# Altium PCB NAPaC_PCB1.PcbDoc
Units mm, origin at the board's own origin, x right, y up, seen from the top; angles counter-clockwise.
Board outline 59.06 x 40.1 mm, 2 copper layers (Top Layer, Bottom Layer); 50 components, 46 nets, 234 pads, 46 vias.
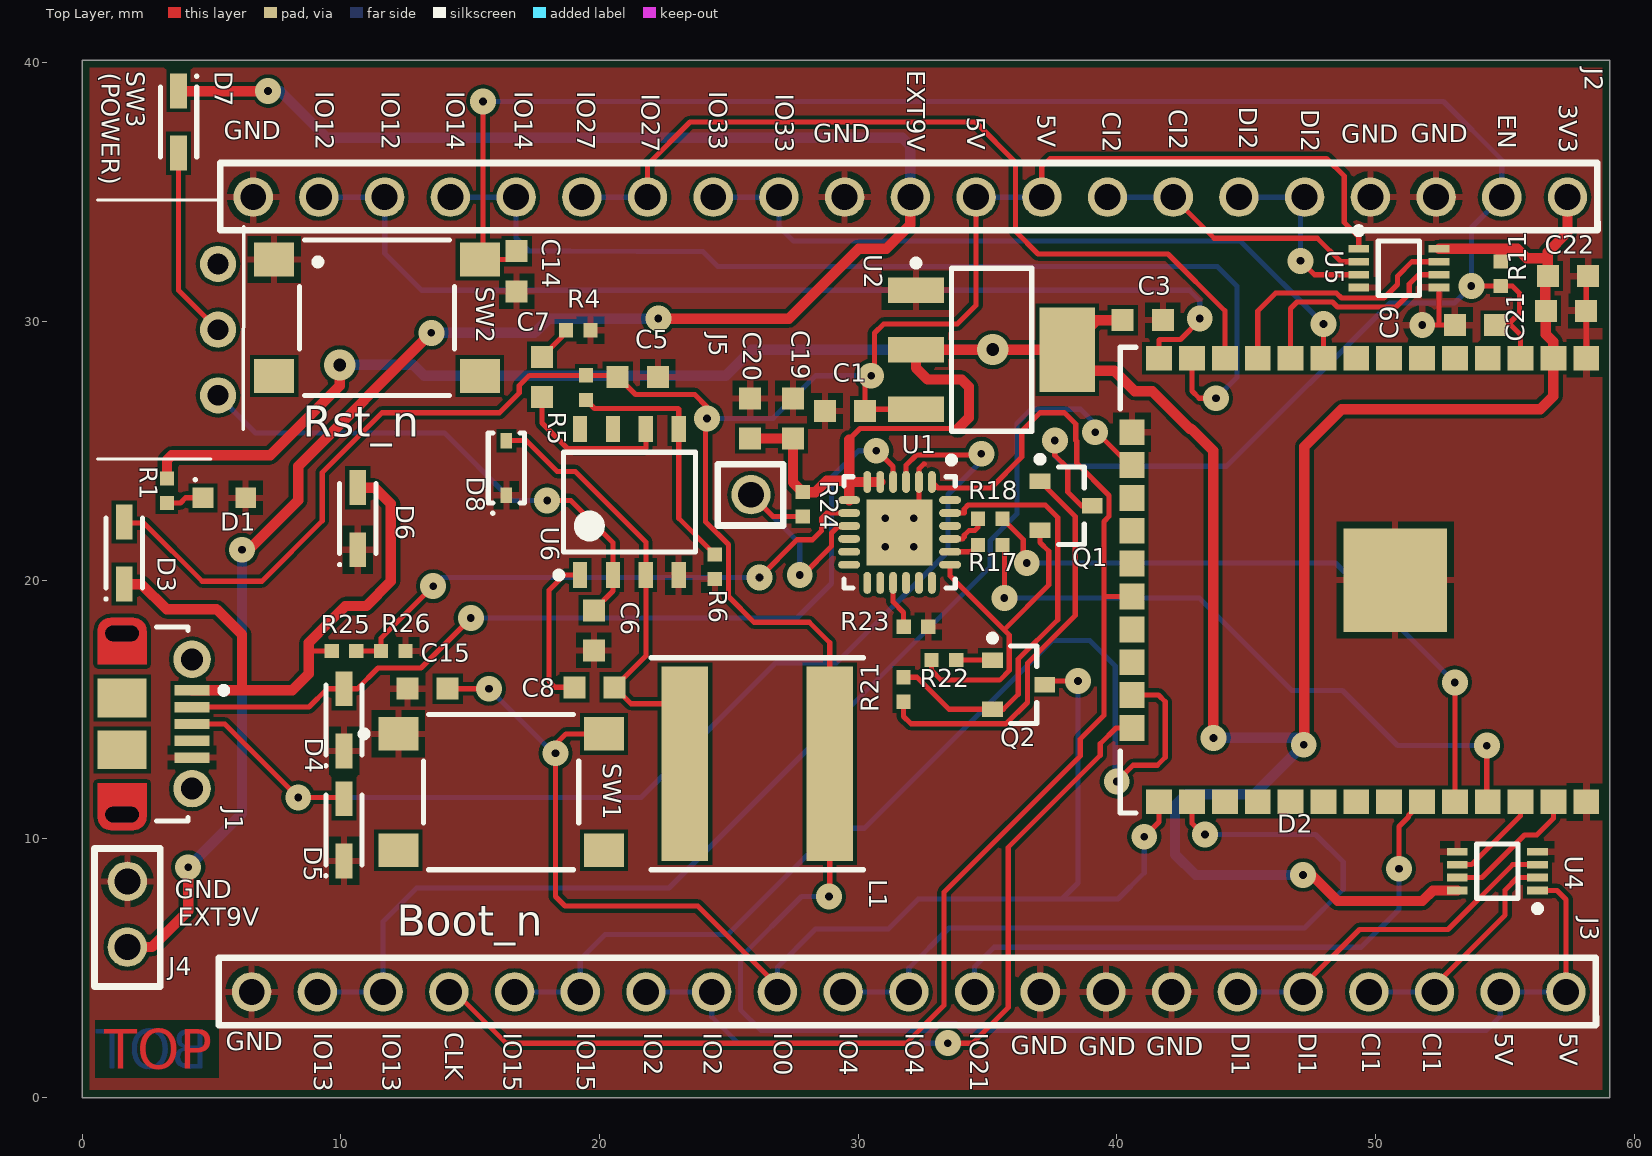
[diagram p0: Top Layer view]
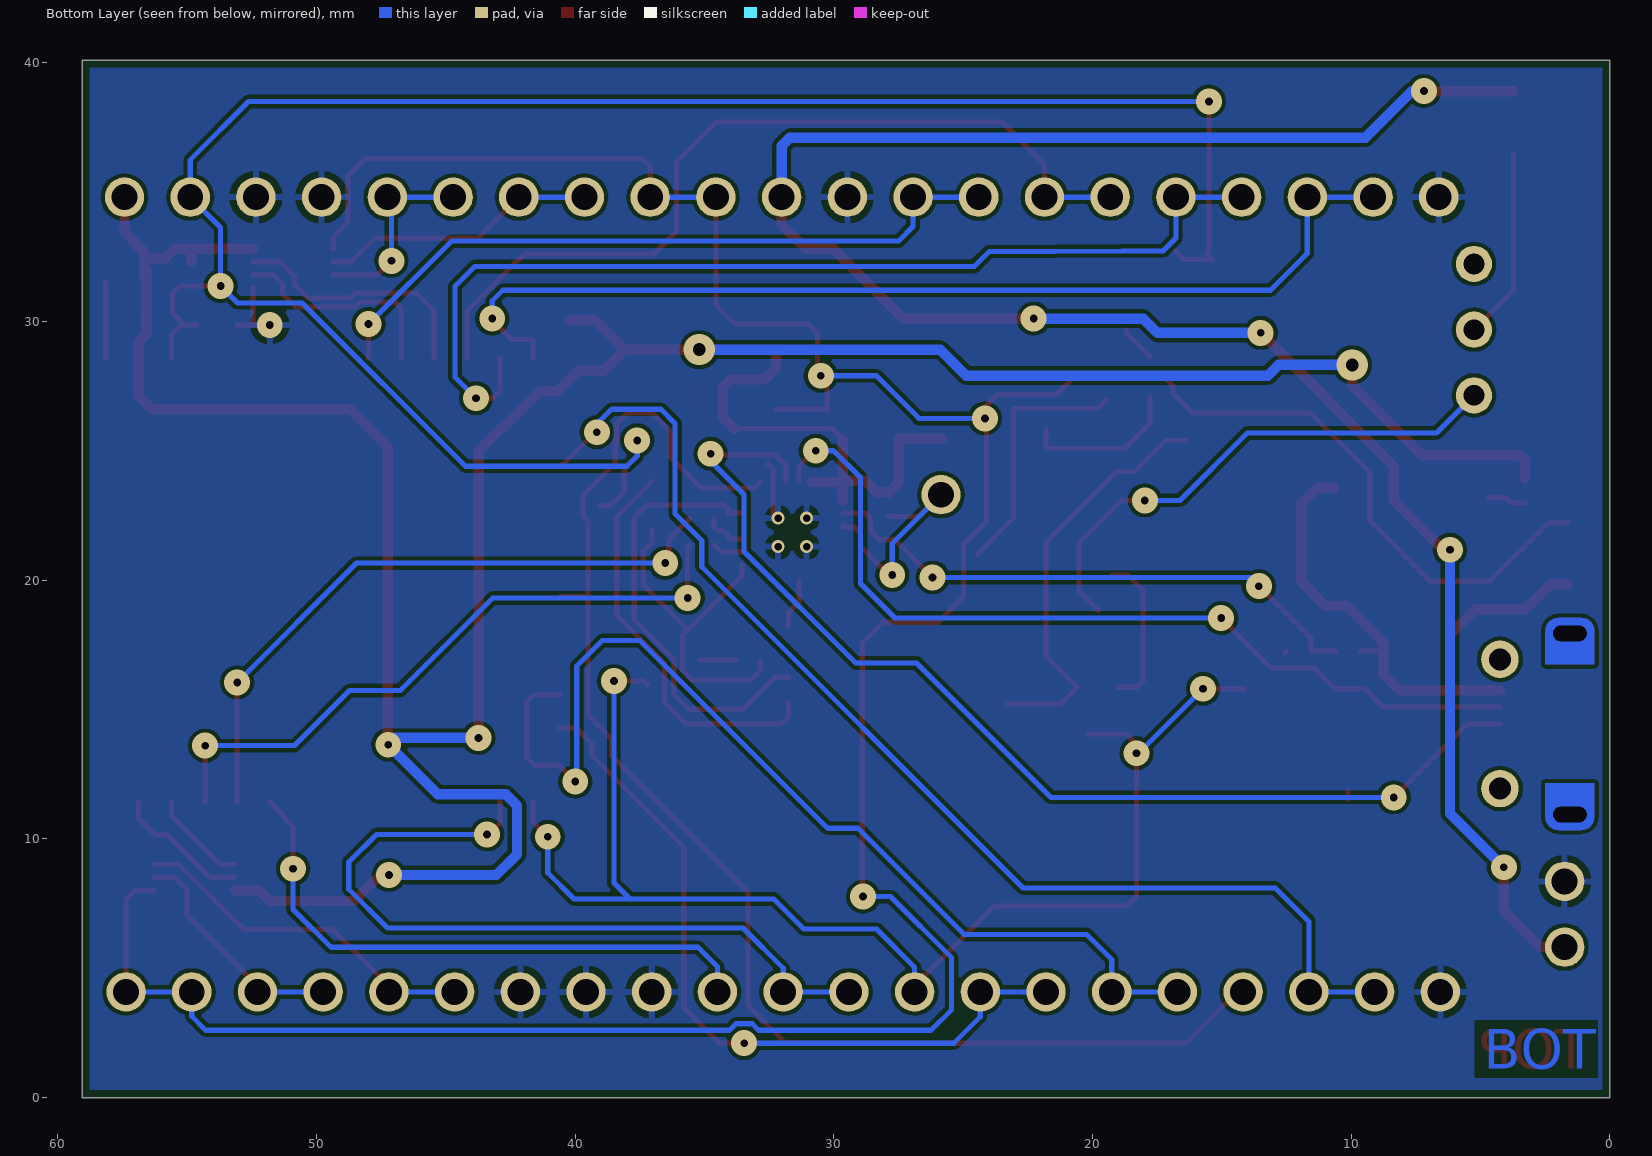
[diagram p1: Bottom Layer view, seen from below]
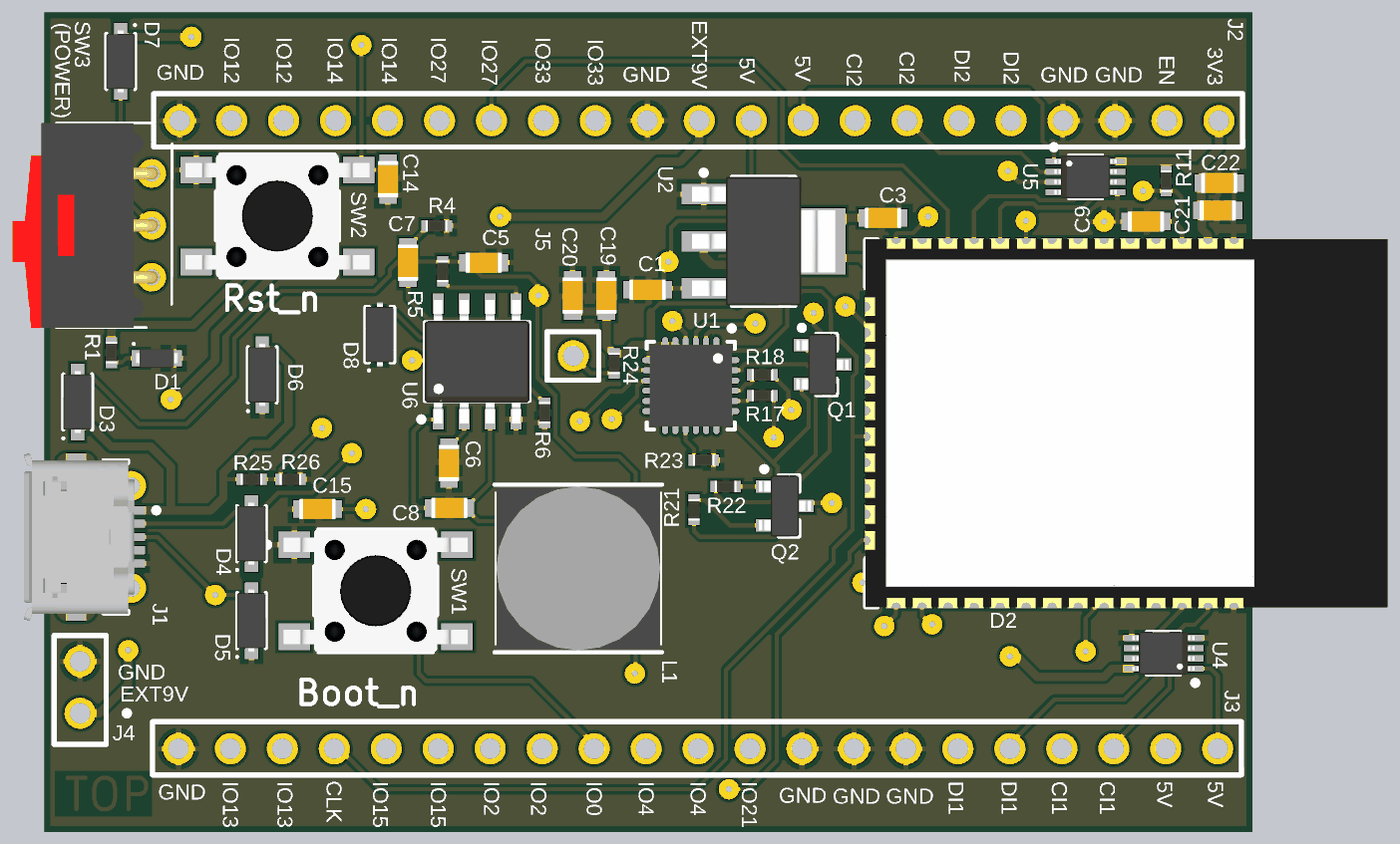
[diagram p2: 3D render of the assembled board from above, using the file's embedded part models]

## Layer stack, top to bottom
Top Solder: solder mask 0.0102, Solder Resist, Dk 3.5
Top Layer: signal copper 0.0356
Dielectric 1: dielectric 0.32, FR-4, Dk 4.8
Bottom Layer: signal copper 0.0356
Bottom Solder: solder mask 0.0102, Solder Resist, Dk 3.5

## Board outline
0,0 59.057,0 59.057,40.1 0,40.1

## Design rules (kind name [scope] priority, off if disabled: settings)
BoardOutlineClearance [All] p1: gap=0.3 ignorepadtopadclearanceinfootprint=FALSE
Clearance Clearance_1 [All] p1: gap=0.15 ignorepadtopadclearanceinfootprint=TRUE
HoleSize [All] p1: absolutevalues=TRUE maxlimit=2.54 minlimit=0.3 maxpercent=80.000 minpercent=20.000
HoleToHoleClearance [All] p1: gap=0.5 allowstackedmicrovias=TRUE
MinimumSolderMaskSliver [All] p1: minsoldermaskwidth=0.1
PlaneConnect [All] p1: planeconnectstyle=Relief reliefexpansion=0.3 reliefentries=4 reliefconductorwidth=0.2 reliefairgap=0.2
PolygonConnect [All] p1: connectstyle=Relief reliefconductorwidth=0.254 reliefentries=4 polygonreliefangle="90 Angle" airgapwidth=0.254
RoutingVias [All] p1: holewidth=0.5 width=1.2 viastyle="Through Hole" minholewidth=0.3 minwidth=1 maxholewidth=1.5 maxwidth=2.5
SilkToSilkClearance [All] p1: silktosilkclearance=0.15
SilkToSolderMaskClearance [IsPad] p1: minsilkscreentomaskgap=0.15 clearancetoexposedcopper=TRUE
SolderMaskExpansion [All] p1: expansion=0.05
UnRoutedNet [All] p1: checkbadconnections=TRUE
Width [All] p1: maxlimit=2 minlimit=0.15 preferedwidth=0.2
23 further rules are at their usual default settings.

## Components (designator, comment, footprint, x,y, rotation, side; value= is the part's Value field where it differs from the comment)
C1 "22uF/10V(20%)" CAPC0603 29.492,26.533 r0 top
C3 "22uF/10V(20%)" CAPC0603 40.999,30.047 r180 top
C5 "22uF/10V(20%)" CAPC0603 21.48,27.857 r180 top
C6 "10µF/35V(20%)" CAPC0603 19.78,18.057 r90 top
C7 "2.2nF/6.3V(10%)" CAPC0603 17.78,27.857 r270 top
C8 "10nF/50V(10%)" CAPC0603 19.805,15.857 r0 top
C9 "0.1uF/50V(10%)" CAPC0603 53.846,29.863 r0 top
C14 "0.1uF/50V(10%)" CAPC0603 16.799,31.939 r90 top
C15 "0.1uF/50V(10%)" CAPC0603 13.357,15.8 r0 top
C19 "0.1uF/50V(10%)" CAPC0603 27.478,26.248 r270 top
C20 "4.7uF/6.3V(10%)" CAPC0603 25.827,26.248 r270 top
C21 "22uF/10V(20%)" CAPC0603 57.357,30.409 r180 top
C22 "0.1uF/50V(10%)" CAPC0603 57.429,31.758 r180 top
D1 "SML-D12U1WT86" SML-D12U1WT86 5.5,23.18 r0 top
D2 "ESP32-WROOM-32" OLMX-ESP-WROOM-32 49.362,20 r270 top
D3 "BAT760" SOD-323 1.63,21.042 r90 top
D4 "CDSOD323-T05LC" SOD-323 10.126,14.6 r90 top
D5 "CDSOD323-T05LC" SOD-323 10.126,10.347 r90 top
D6 "CDSOD323-T05LC" SOD-323 10.657,22.372 r90 top
D7 "BAT760" SOD-323 3.731,37.7 r270 top
D8 "B140WS-7" SOD-323-SCHOTTKY_DIODE-40V/1A 16.399,24.335 r90 top
J1 "47491-0001" USB-MICRO-B_V 2.9,14.438 r270 top
J2 "CON_21P" PINS_HEADER-21 57.417,34.8 r180 top
J3 "CON_21P" PINS_HEADER-21 57.357,4.08 r180 top
J4 "CON_2P" PINS_ALIM-2 1.75,5.815 r90 top
J5 "PIN_TESTPOINT" PIN_TESTPOINT 25.857,23.3 r0 top
L1 "15uH/2.4A" NRS8040-SELF-15uH/2.4A 26.1,12.9 r0 top
Q1 "S8050-G-NPN" SOT23 38.038,22.87 r0 top
Q2 "S8050-G-NPN" SOT23 36.199,15.957 r0 top
R1 "2K(5%)" RC0402 3.281,23.455 r90 top
R4 "15K(5%)" RC0402 19.18,29.657 r180 top
R5 "28.7K(1%)" RC0402 19.48,27.438 r90 top
R6 "10K(1%)" RC0402 24.457,20.516 r90 top
R11 "10K(5%)" RC0402 54.835,31.841 r90 top
R17 "0R(5%)" RC0402 35.102,21.356 r180 top
R18 "0R(5%)" RC0402 35.102,22.372 r180 top
R21 "10K(5%)" RC0402 31.754,15.769 r270 top
R22 "10K(5%)" RC0402 33.311,16.907 r0 top
R23 "10K(5%)" RC0402 32.232,18.2 r180 top
R24 "2K(5%)" RC0402 27.857,22.93 r270 top
R25 "22.1K(5%)" RC0402 10.126,17.262 r0 top
R26 "47.5K(5%)" RC0402 12.031,17.262 r180 top
SW1 "PTS645S" CKCP-PTS645S_V 16.199,11.806 r0 top
SW2 "PTS645S" CKCP-PTS645S_V 11.399,30.139 r0 top
SW3 "SWITCH_SLIDE" SW_SLIDE 5.255,29.679 r90 top
U1 "CP2102N-A01-GQFN24" CP2102N-GQFN24 31.6,21.842 r270 top
U2 "LM1117IMP3.3/NOPB" LM1117 35.157,28.904 r0 top
U4 "SN74LVC2T45DCTRE4" VOLTAGE_TRANSLATOR_3.3-5V 54.707,8.75 r180 top
U5 "SN74LVC2T45DCTRE4" VOLTAGE_TRANSLATOR_3.3-5V 50.9,32.054 r0 top
U6 "ACT4060ASH-T" SWITCHING_VOLTAGE_REGULATOR 21.157,23.016 r90 top

## Footprints (in the part's own frame and the unit in brackets; to place one, negate y for a bottom-side part, rotate by r counter-clockwise, add the part's x,y. Pads: shape width x height; smd on the part's side, far side on the other; paste and mask are expansions set on the pad)
CAPC0603 [mm] "Chip Capacitor, 2-Leads, Body 1,60x0,80mm, IPC Medium Density"
  rect 0.85x0.85 smd: 1(-0.775,0) 2(0.775,0)
  body extent -0.9,-0.5 0.9,0.5, height 1
CKCP-PTS645S_V [mm] "THD, 4-Leads, Body 6x6mm, Pitch 4.5mm"
  rect 1.55x1.3 smd: 1(-3.975,2.25) 2(3.975,2.25) 3(-3.975,-2.25) 4(3.975,-2.25)
  silkscreen extent -5.42,-3 3,3, body extent -4.5,-3 4.5,3, height 4.3
CP2102N-GQFN24 [mm] "QFN, 24-Leads, Body 4,00x4,00mm, Pitch 0,50mm, Thermal Pad 2,55x2,55mm, IPC Medium Density"
  oval 0.85x0.3 smd: 1(-1.95,1.25) 2(-1.95,0.75) 3(-1.95,0.25) 4(-1.95,-0.25) 5(-1.95,-0.75) 6(-1.95,-1.25) 13(1.95,-1.25) 14(1.95,-0.75) 15(1.95,-0.25) 16(1.95,0.25) 17(1.95,0.75) 18(1.95,1.25)
  oval 0.3x0.85 smd: 7(-1.25,-1.95) 8(-0.75,-1.95) 9(-0.25,-1.95) 10(0.25,-1.95) 11(0.75,-1.95) 12(1.25,-1.95) 19(1.25,1.95) 20(0.75,1.95) 21(0.25,1.95) 22(-0.25,1.95) 23(-0.75,1.95) 24(-1.25,1.95)
  rect 2.55x2.55 smd: 25(0,0)
  silkscreen extent -2.92,-2.15 2.15,2.15, body extent -2.01,-2.01 2.01,2.01, height 0.8
LM1117 [mm] "SOT223, 4-Leads, Body 6,50x7,00mm (avg), Pitch 2,30mm, IPC Medium Density"
  rect 2.15x1 smd: 1(-2.925,2.3) 2(-2.925,0) 3(-2.925,-2.3)
  rect 2.15x3.25 smd: 4(2.925,0)
  silkscreen extent -3.05,-3.15 1.55,3.47, body extent -3.5,-3.15 3.5,3.15, height 1.8
NRS8040-SELF-15uH/2.4A [mm] "Precision Wire Wound Inductor, 2-Leads, Body 8,00x8,00mm, IPC Medium Density"
  rect 1.8x7.5 smd: 1(-2.8,0) 2(2.8,0)
  silkscreen extent -4.1,-4.1 4.1,4.1, body extent -4.1,-4 4.1,4, height 4.1
OLMX-ESP-WROOM-32 [mm] "SMD, 38-Leads, Body 18x25.5mm, Pitch 1.27mm"
  rect 0.95x1 smd: 1(-8.575,8.78) 2(-8.575,7.51) 3(-8.575,6.24) 4(-8.575,4.97) 5(-8.575,3.7) 6(-8.575,2.43) 7(-8.575,1.16) 8(-8.575,-0.11) 9(-8.575,-1.38) 10(-8.575,-2.65) 11(-8.575,-3.92) 12(-8.575,-5.19) 13(-8.575,-6.46) 14(-8.575,-7.73) 25(8.575,-7.73) 26(8.575,-6.46) 27(8.575,-5.19) 28(8.575,-3.92) 29(8.575,-2.65) 30(8.575,-1.38) 31(8.575,-0.11) 32(8.575,1.16) 33(8.575,2.43) 34(8.575,3.7) 35(8.575,4.97) 36(8.575,6.24) 37(8.575,7.51) 38(8.575,8.78)
  rect 4x4 smd: 1(0,1.395)
  rect 1x0.95 smd: 15(-5.715,-8.78) 16(-4.445,-8.78) 17(-3.175,-8.78) 18(-1.905,-8.78) 19(-0.635,-8.78) 20(0.635,-8.78) 21(1.905,-8.78) 22(3.175,-8.78) 23(4.445,-8.78) 24(5.715,-8.78)
  silkscreen extent -9,-9.23 9,-8.63, body extent -9.04,-9.25 9.04,16.29, height 3.04
PIN_TESTPOINT [mil]
  round 60 hole 39.37: 1(0,0)
  silkscreen extent -50,-47 49,46
PINS_ALIM-2 [mil]
  round 60 hole 39.37: 1(0,0) 2(100,0)
  round 20 on Top Overlay: ""(0,-90)
  silkscreen extent -60,-50 150,50
PINS_HEADER-21 [mil]
  round 60 hole 39.37: 1(0,0) 2(100,0) 3(200,0) 4(300,0) 5(400,0) 6(500,0) 7(600,0) 8(700,0) 9(800,0) 10(900,0) 11(1000,0) 12(1100,0) 13(1200,0) 14(1300,0) 15(1400,0) 16(1500,0) 17(1600,0) 18(1700,0) 19(1800,0) 20(1900,0) 21(2000,0)
  silkscreen extent -46,-52 2050,50
RC0402 [mm] "Chip Resistor, 2-Leads, Body 1,02x0,50mm, IPC Medium Density"
  rect 0.55x0.55 smd: 1(-0.475,0) 2(0.475,0)
  body extent -0.53,-0.28 0.53,0.28, height 0.4
SML-D12U1WT86 [mm] "Molded Diode, 2-Leads, Body 1,60x0,80mm, IPC Medium Density"
  rect 0.8x0.8 smd: 1(-0.825,0) 2(0.825,0)
  silkscreen extent -1.17,0.65 -1.07,0.75, body extent -1.07,-0.45 1.07,0.45, height 0.65
SOD-323 [mm]
  rect 1.35x0.65 smd: 1(-1.2,0) 2(1.2,0)
  silkscreen extent -1.82,-0.7 1.35,0.75, body extent -1.57,-0.7 1.57,0.7, height 1.1
SOD-323-SCHOTTKY_DIODE-40V/1A [mm]
  rect 0.59x0.45 smd: 1(-1.055,0) 2(1.055,0)
  silkscreen extent -1.8,-0.7 1.35,0.7, body extent -1.57,-0.7 1.57,0.7, height 1.1
SOT23 [mm] "SOT23, 3-Leads, Body 2,90x2,40mm, Pitch 0,95mm, IPC Medium Density"
  rect 0.8x0.6 smd: 1(-1.01,0.95) 2(-1.01,-0.95) 3(1.01,0)
  silkscreen extent -1.13,-1.5 0.7,1.92, body extent -1.28,-1.5 1.28,1.5, height 1.1
SW_SLIDE [mm]
  round 1.4 hole 0.8: 1(0,0) 2(-2.54,0) 3(2.54,0)
  silkscreen extent -5,-0.99 5.01,4.66, body extent -5,-0.3 5,6.8, height 2.51
SWITCHING_VOLTAGE_REGULATOR [mm]
  rect 1x0.55 smd: 1(-2.825,1.905) 2(-2.825,0.635) 3(-2.825,-0.635) 4(-2.825,-1.905) 5(2.825,-1.905) 6(2.825,-0.635) 7(2.825,0.635) 8(2.825,1.905)
  silkscreen extent -2.95,-2.55 1.92,2.85, body extent -3.03,-2.55 3.03,2.55, height 1.75
USB-MICRO-B_V [mm] "USB, MICRO B, Body 7.491x4.695 mm, Pitch 0.65 mm"
  rect 0.4x1.35 smd: 1(-1.3,1.35) 2(-0.65,1.35) 3(0,1.35) 4(0.65,1.35) 5(1.3,1.35)
  rrect50% 0x0 hole 0.6 slot 1.3 at 90 deg: 8(-3.5,-1.35) 11(3.5,-1.35)
  round 1.45 hole 0.85: ""(-2.5,1.35) ""(2.5,1.35)
  rect 1.5x1.9 smd: ""(-1,-1.35) ""(1,-1.35)
  Multi-Layer circle w0.5: c-3.6,-1.8 r0.25
  Multi-Layer circle w0.5: c-3.6,-0.9 r0.25
  Multi-Layer circle w0.5: c3.6,-0.9 r0.25
  Multi-Layer circle w0.5: c3.6,-1.8 r0.25
  Multi-Layer region: -2.3,-2.3 -2.3,-0.4 -3.6,-0.4 -3.6,-2.3
  Multi-Layer region: -3.6,-1.8 -3.6,-0.9 -4.1,-0.9 -4.1,-1.8
  Multi-Layer region: 2.3,-0.4 2.3,-2.3 3.6,-2.3 3.6,-0.4
  Multi-Layer region: 3.6,-0.9 3.6,-1.8 4.1,-1.8 4.1,-0.9
  silkscreen extent -3.75,-0.01 3.75,2.7, body extent -4.1,-3.9 4.1,1.5, height 2.67
VOLTAGE_TRANSLATOR_3.3-5V [mm] "TSSOP, 8-Leads, Body 2,00x2,30mm, Pitch 0,50mm, IPC Medium Density"
  rect 0.8x0.3 smd: 1(-1.55,0.75) 2(-1.55,0.25) 3(-1.55,-0.25) 4(-1.55,-0.75) 5(1.55,-0.75) 6(1.55,-0.25) 7(1.55,0.25) 8(1.55,0.75)
  silkscreen extent -1.68,-1.05 0.8,1.57, body extent -1.55,-1.05 1.55,1.05, height 0.9

## Part data
C1 C3 C5 C21: library part CAP-22uF/10V(20%), "GRM188R61A226ME15D-22uF/10V(20%)", Supplier Part Number 1=490-10476-6-ND, Supplier 1=Digi-Key
C6: library part CAP-10µF/35V(20%), "C0603C106M8PACTU", Supplier Part Number 1=80-C0603C106M8PACTU, Supplier 1=Mouser
C7: library part CAP-2.2nF/6.3V(10%), "C0603X7R0J222K030BA", Supplier Part Number 1=810-C0603X7R0J222K0A, Supplier 1=Mouser
C8: library part CAP-10nF/50V(10%), "C1608X7R1H103K080AE", Supplier Part Number 1=810-C1608X7R1H103KAE, Supplier 1=Mouser
C9 C14 C15 C19 C22: library part CAP-0.1uF/50V(10%), "GRM188R71H104KA93D-0.1uF/50V(10%)", Supplier Part Number 1=16520001, Supplier 1=Distrelec
C20: library part CAP-0.4uF/6.3V(10%), "GRT188C80J475KE01D", Supplier Part Number 1=81-GRT188C80J475KE1D, Supplier 1=Mouser
D1: library part RED_LED, "SML-D12U1WT86-2.2V-20mA", Supplier Part Number 1=755-SML-D12U1WT86, Supplier 1=Mouser
D2: library part ESP-WROOM-32, Supplier Part Number 1=356-ESP-WROOM-32, Supplier 1=Mouser
D3 D7: library part SchottkyDiode, "BAT760-7-Schottky Diodes & Rectifiers 0.5A 30V LF", Supplier Part Number 1=BAT760-7/BKN, Supplier 1=Avnet
D4 D5 D6: library part BidirectionalDiode, Supplier Part Number 1=652-CDSOD323-T05LC, Supplier 1=Mouser
D8: library part SCHOTTKY_DIODE-40V/3A, "Diode Schottky 40V 1A 2-Pin SOD-323 T/R", Supplier Part Number 1=621-B140WS-7, Supplier 1=Mouser
J1: library part USB_CON8, "USB Connectors MICRO USB B RECPT MIDDLE MNT ASSY", Supplier Part Number 1=30076400, Supplier 1=Distrelec
J2 J3: library part PINS_HEADER, "21 Positions Header, Breakaway Connector 0.100\" (2.54mm) Through Hole Tin", Supplier Part Number 1=S1012EC-21-ND, Supplier 1=Digi-Key
J4: library part PIN_ALIM, "2 Positions Header, Breakaway Connector 0.100\" (2.54mm) Through Hole Tin"
J5: "1 Position Header, Breakaway Connector 0.100\" (2.54mm) Through Hole Tin"
L1: library part SELF-15uH/2.4A, "NRS8040T150MJGJ", Supplier Part Number 1=963-NRS8040T150MJGJ, Supplier 1=Mouser
Q1: library part SS8050-G-NPN, "750-SS8050-G-BJT NPN SOT-23-3 TRANSISTOR 1.5A 40V", Supplier Part Number 1=750-SS8050-G, Supplier 1=Mouser
Q2: library part SS8050-G-NPNbis, "750-SS8050-G-BJT NPN SOT-23-3 TRANSISTOR 1.5A 40V"
R1 R24: library part RESISTOR-2K(5%), "RC0402JR-072KL", Supplier Part Number 1=67R9979, Supplier 1=Newark
R4: library part RESISTOR-15K(5%), "RC0402JR-7D43KL", Supplier Part Number 1=603-RC0402JR-7D43KL, Supplier 1=Mouser
R5: library part RESISTOR-28.7K(1%), "RC0402JR-072K7L", Supplier Part Number 1=67R9981, Supplier 1=Newark
R6: library part RESISTOR-10K(1%), "RC0402F103CS", Supplier Part Number 1=1276-3530-6-ND, Supplier 1=Digi-Key
R11 R21 R22 R23: library part RESISTOR-10K(5%), "RC0402JR-0710KL", Supplier Part Number 1=67R9964, Supplier 1=Newark
R17 R18: library part RESISTOR-0R(5%), "RC0402JR-070RL", Supplier Part Number 1=67R9963, Supplier 1=Newark
R25: library part RESISTOR-22.1K(5%), "RC0402FR-0722K1L", Supplier Part Number 1=RC0402FR-0722K1L**MULT1, Supplier 1=Arrow
R26: library part RESISTOR-47.5K(5%), "RC0402FR-0747K5L", Supplier Part Number 1=2781938, Supplier 1="Future Electronics"
SW1 SW2: library part SW, "PTS645SL432LFS", Supplier 1=Avnet, Supplier Part Number 1=PTS645SL432LFS
SW3: "48ASSP1S1M6QBT", Supplier Part Number 1=11087397, Supplier 1=Distrelec
U1: library part CP2102N-GQFN24, Supplier Part Number 1=336-3693-ND, Supplier 1=Digi-Key
U2: library part LM1117-3.3, Supplier Part Number 1=173-06-781, Supplier 1=Distrelec
U4 U5: library part VOLTAGE_TRANSLATOR_3.3-5V, "Translation - Voltage Levels DUAL-BIT DUAL SUPPLY TRANSCEIVER", Supplier Part Number 1=9592768, Supplier 1=Farnell
U6: library part SWITCHING_VOLTAGE_REGULATOR, Supplier Part Number 1=107-ACT4060ASH-T, Supplier 1=Mouser

## Via types
v1: diameter 1, hole 0.3, Top Layer to Bottom Layer, 40 vias
v2: diameter 0.5, hole 0.3, Top Layer to Bottom Layer, 4 vias
v3: diameter 1.2, hole 0.5, Top Layer to Bottom Layer, 2 vias

## Nets (pads, with @x,y where several pads share a name; then routed paths per layer and width w, separated by ;. In a path a pad name is that pad's centre, name@x,y a point inside that pad or via, vN(x,y) a via of type N, cw(c..) or ccw(c..) an arc to the next point about the centre after c; other vN are vias at no path point)
3V3: C3.2 C19.2 C20.2 C21.2 C22.2 D2.2 J2.1 R1.2 R11.2 R24.1 U1.5 U1.6 U1.7 U2.2 U2.4 U4.8 U5.8 | length 139.1
  Top Layer w0.2: 29.65,25.433 30.071,25.854 33.854,25.854
  Top Layer w0.4: R1.2 3.281,24.636 3.465,24.82 7.276,24.82 9.96,27.504 v3(9.96,28.32) ; C20.2 C19.2 27.478,23.785 27.862,23.4 28.34,23.4 28.782,23.842 29.65,23.842 ; U1.7 29.65,23.842 ; 29.65,25.433 29.65,23.842 ; U1.5 U1.6 29.7,23.792 29.65,23.842 ; 33.854,25.854 34.28,26.28 34.28,27.48 34.01,27.75 32.682,27.75 32.232,28.2 U2.2 v3(35.2,28.904) U2.4 ; C3.2 39.225,30.047 U2.4 ; v1(43.737,13.9) 43.72,13.917 43.72,25 42.866,25.854 42.815,25.854 41.369,27.3 40.685,27.3 39.9,28.085 38.901,28.085 U2.4 ; v1(47.197,8.6) 47.531,8.6 48.536,7.595 51.8,7.595 52.205,8 U4.8 ; v1@47.245,13.635 47.245,25.16 48.689,26.604 56.364,26.604 56.872,27.112 D2.2 56.872,29.21 56.582,29.5 C21.2 56.554,30.436 C22.2@56.554,31.958 ; U5.8 54.8,32.804 ; R11.2 54.835,32.769 54.8,32.804 ; C22.2 56.654,32.426 ; J2.1 57.417,33.44 56.654,32.678 56.654,32.426 ; 54.8,32.804 55.476,32.804 55.84,32.44 56.64,32.44 56.654,32.426
  Bottom Layer w0.4: v3(9.96,28.32) 12.807,28.32 13.227,27.9 24.875,27.9 25.879,28.904 v3(35.2,28.904) ; v1(43.737,13.9) 46.958,13.9 v1(47.223,13.635) 47.223,13.632 45.311,11.72 42.68,11.72 42.244,11.284 42.244,9.407 43.051,8.6 v1(47.197,8.6)
ACTIVE: R23.2 U1.15 | length 1.9
  Top Layer w0.2: U1.15@31.346,19.952 31.346,19.16 31.757,18.749 R23.2
CI1: J3.3 J3.4 U4.2 | length 8.8
  Top Layer w0.2: J3.3@52.277,4.32 55.007,7.05 55.007,8.018 55.489,8.5 U4.2
  Bottom Layer w0.2: J3.4 J3.3
CI2: J2.7 J2.8 U5.2 | length 10.7
  Top Layer w0.2: J2.7 43.761,33.216 47.747,33.216 48.659,32.304 U5.2
  Bottom Layer w0.2: J2.8 J2.7
CLK: D2.20 J3.18 U1.1 | length 55
  Top Layer w0.2: J3.18@14.177,4.32 16.397,2.1 31.856,2.1 33.32,3.564 33.32,7.937 38.583,13.2 38.583,13.858 39.5,14.775 39.5,19.365 ; U1.1 33.082,23.56 35.127,23.56 36.32,24.753 36.32,25.76 37.026,26.466 37.974,26.466 38.409,26.031 38.409,25.404 38.45,25.364 38.45,24.521 39.698,23.274 39.698,22.466 39.5,22.269 39.5,19.365 ; D2.20 39.5,19.365
DI1: J3.5 J3.6 U4.3 | length 13.5
  Top Layer w0.2: J3.5@47.197,4.32 49.372,6.495 52.793,6.495 55.298,9 U4.3
  Bottom Layer w0.2: J3.6 J3.5
DI2: J2.5 J2.6 U5.3 | length 7.5
  Top Layer w0.2: v1(47.1,32.339) 47.635,31.804 U5.3
  Bottom Layer w0.2: J2.6 J2.5 47.1,34.643 v1(47.1,32.339)
DTRb: Q2.2 R21.1 U1.23 | length 17.2
  Top Layer w0.2: R21.1 32.276,16.244 33.513,15.007 Q2.2 35.607,15.007 36.189,15.589 36.189,16.944 37.713,18.468 37.713,22.415 37.231,22.897 34.249,22.897 34.102,22.75 34.102,22.592 U1.23
EN: C9.2 C14.2 D2.3 J2.2 Q1.3 R11.1 SW2.2 | length 82
  Top Layer w0.2: v1(15.5,38.5) 15.5,32.714 15.6,32.614 SW2.2 16.474,32.389 C14.2@16.799,32.714 ; v1(37.6,25.4) 37.6,24.827 38.1,24.327 38.1,23.406 38.636,22.87 Q1.3 ; v1(53.7,31.364) 54.833,31.364 R11.1 55.279,31.366 55.56,31.085 55.56,30.32 55.103,29.863 ; C9.2 55.103,29.863 ; D2.3 55.602,29.482 55.221,29.863 55.103,29.863
  Bottom Layer w0.2: v1(15.5,38.5) 52.62,38.5 54.877,36.243 J2.2 53.7,33.623 v1(53.7,31.364) 53.05,30.714 50.552,30.714 44.238,24.4 38,24.4 37.6,24.8 v1(37.6,25.4)
EXT_5V: C1.2 C5.2 D3.2 J2.9 J2.10 J3.1 J3.2 L1.2 R5.2 U2.3 U4.1 U5.1 | length 135.2
  Top Layer w0.2: D3.2 1.672,22.2 2.4,22.2 4.643,19.957 6.95,19.957 9.286,22.294 9.286,24.159 11.593,26.466 16.139,26.466 16.9,27.227 16.9,27.515 17.298,27.913 20.648,27.913 C5.2 21.391,27.171 23.68,27.171 24.159,26.692 v1(24.159,26.248) ; v1@24.1,26.248 24.1,22.252 24.982,21.37 24.982,19.362 25.972,18.372 28.108,18.372 28.9,17.58 L1.2 28.9,7.797 v1(28.868,7.765) ; U2.3 30.267,26.604 C1.2 30.267,27.667 v1(30.5,27.9) 30.633,28.033 30.633,29.545 30.987,29.9 33.831,29.9 34.557,30.625 J2.10 ; J2.9 37.097,35.977 37.42,36.3 48.1,36.3 48.785,35.615 48.785,33.816 49.35,33.25 U5.1 ; U4.1 57.012,8 57.357,7.655 J3.1
  Bottom Layer w0.2: v1(24.159,26.248) 26.728,26.248 26.728,26.276 28.352,27.9 v1(30.5,27.9) ; v1(28.868,7.765) 27.805,7.765 25.445,5.405 25.445,3.395 26.24,2.6 32.905,2.6 33.155,2.85 33.776,2.85 34.026,2.6 54.28,2.6 54.817,3.137 J3.2 J3.1 ; J2.10 J2.9
EXT_9V: D7.1 J2.11 J4.1 | length 81.8
  Top Layer w0.4: J4.1 2.695,5.815 4.101,7.221 v1(4.101,8.9) ; D7.1 v1(7.191,38.9) ; v1(6.184,21.171) 6.44,21.171 8.35,23.082 8.35,24.407 v1(13.5,29.557) ; v1(22.275,30.107) 27.323,30.107 30.017,32.8 31.08,32.8 32.017,33.737 J2.11
  Bottom Layer w0.4: v1(4.101,8.9) 6.184,10.983 v1(6.184,21.171) ; v1(7.191,38.9) 7.664,38.9 9.464,37.1 31.7,37.1 32.017,36.783 J2.11 ; v1(13.5,29.557) 17.49,29.557 18.04,30.107 v1(22.275,30.107)
GND: C1.1 C3.1 C5.1 C6.1 C9.1 C14.1 C15.1 C19.1 C20.1 C21.1 C22.1 D1.2 D2.1 D2.15 D2.38 D4.1 D5.1 D6.1 D8.1 J1.5 J2.3 J2.4 J2.12 J2.21 J3.7 J3.8 J3.9 J3.21 J4.2 R4.1 R6.1 R23.1 R26.1 SW1.1 SW2.1 U1.2 U1.25 U2.1 U4.4 U4.5 U5.4 U5.5 U6.4 | length 8
  Top Layer w0.2: R26.1 R26.1@12.582,17.186 ; v2(32.15,22.392) 32.35,22.592 U1.2 32.35,24.305 32.535,24.49 32.566,24.49 ; v1(51.8,29.864) 52.45,29.864 ; U5.5 52.45,29.864 ; C9.1 53.07,29.864 52.45,29.864 ; D2.1@58.142,28.575 C22.1@58.142,31.514
  other v2: 31.05,21.292 32.15,21.292 31.05,22.392
IO0: C15.2 D2.25 J3.13 Q2.3 SW1.2 | length 52.8
  Top Layer w0.2: C15.2 v1(15.726,15.8) ; SW1.2 18.7,14.056 18.3,13.656 18.3,7.765 18.665,7.4 23.797,7.4 J3.13@26.877,4.32 ; Q2.3 37.353,16.1 v1(38.5,16.1) ; v1(41.058,10.08) 41.632,10.654 D2.25
  Bottom Layer w0.2: v1(15.726,15.8) 18.22,13.306 v1(18.3,13.306) ; J3.13 26.877,5.037 28.349,6.509 31.16,6.509 32.32,7.669 37.88,7.669 ; v1(38.5,16.1) 38.5,8.289 37.88,7.669 ; v1(41.058,10.08) 41.058,8.687 40.04,7.669 37.88,7.669
IO2: D2.24 J3.14 J3.15 | length 29.1
  Top Layer w0.2: v1(33.465,2.1) 34.42,2.1 35.8,3.48 35.8,9.669 39.357,13.226 39.357,13.674 39.968,14.285 D2.24
  Bottom Layer w0.2: J3.15 J3.14 24.337,3.123 25.36,2.1 v1(33.465,2.1)
IO4: D2.26 J3.11 J3.12 | length 29.9
  Top Layer w0.2: D2.26 42.902,10.6 43.334,10.167 v1(43.4,10.167)
  Bottom Layer w0.2: J3.12 J3.11 31.957,4.999 33.506,6.548 47.248,6.548 48.75,8.05 48.75,9.097 47.68,10.167 v1(43.4,10.167)
IO12: D2.14 J2.19 J2.20 | length 40.3
  Top Layer w0.2: D2.14 41.632,29.279 41.657,29.304 42.457,29.304 43.2,30.047 v1(43.2,30.107)
  Bottom Layer w0.2: J2.20 J2.19 11.697,32.623 13.12,31.2 42.794,31.2 43.2,30.794 v1(43.2,30.107)
IO13: D2.16 J3.19 J3.20 | length 46.2
  Top Layer w0.2: v1(39.159,25.715) 39.222,25.715 40.537,24.4 D2.16
  Bottom Layer w0.2: J3.20 J3.19 11.637,6.797 12.94,8.1 22.686,8.1 35.102,20.516 35.102,21.53 36.132,22.56 36.132,26.048 36.685,26.6 38.587,26.6 39.159,26.028 v1(39.159,25.715)
IO14: D2.13 J2.17 J2.18 | length 39.7
  Top Layer w0.2: D2.13 42.902,27.31 43.183,27.029 v1(43.829,27.029)
  Bottom Layer w0.2: J2.18 J2.17 16.777,33.223 17.276,32.724 18.852,32.724 24.001,32.693 24.573,32.12 43.88,32.12 44.64,31.36 44.64,27.84 v1(43.829,27.029)
IO15: D2.23 J3.16 J3.17 | length 40.2
  Top Layer w0.2: v1(39.993,12.21) 40.623,12.84 41.56,12.84 41.869,13.149 41.869,15.295 41.609,15.555 D2.23
  Bottom Layer w0.2: J3.17 J3.16 19.257,5.337 20.22,6.3 24.96,6.3 29.067,10.407 30.24,10.407 37.5,17.667 38.952,17.667 39.935,16.684 v1@39.935,12.269
IO21: D2.33 J3.10 | length 22.8
  Top Layer w0.2: v1(50.9,8.844) 50.9,10.475 51.272,10.846 51.272,10.905 D2.33
  Bottom Layer w0.2: J3.10 34.497,5.057 35.249,5.809 49.437,5.809 50.9,7.272 v1(50.9,8.844)
IO22: D2.36 U4.6 | length 3.8
  Top Layer w0.2: U4.6 53.711,9 55.602,10.891 D2.36
IO23: D2.37 U4.7 | length 5.3
  Top Layer w0.2: U4.7 54.114,8.5 55.76,10.146 56.226,10.146 56.872,10.792 D2.37
IO25: D2.10 U5.6 | length 8.6
  Top Layer w0.2: D2.10 46.712,30.5 46.963,30.751 48.334,30.751 48.531,30.554 50.791,30.554 51.299,31.061 51.299,31.443 51.66,31.804 U5.6
IO26: D2.11 U5.7 | length 10
  Top Layer w0.2: D2.11 45.442,30.4 46.142,31.101 48.479,31.101 48.676,30.904 50.32,30.904 50.84,31.424 50.84,31.744 51.4,32.304 U5.7
IO27: D2.12 J2.15 J2.16 | length 33.2
  Top Layer w0.2: J2.15 21.857,36.057 23.5,37.7 34.531,37.7 36.082,36.149 36.082,33.48 36.955,32.606 41.974,32.606 44.172,30.409 D2.12
  Bottom Layer w0.2: J2.16 J2.15
IO33: D2.9 J2.13 J2.14 | length 27.6
  Top Layer w0.2: D2.9 v1(47.982,29.901)
  Bottom Layer w0.2: J2.14 J2.13 26.937,33.663 27.5,33.1 44.783,33.1 v1(47.982,29.901)
NetC6_2: C6.2 SW3.2 U6.2 | length 20.5
  Top Layer w0.2: v1(17.977,23.08) 18.887,23.08 20.522,21.445 20.522,19.574 C6.2
  Bottom Layer w0.2: SW3.2 6.709,25.685 14.015,25.685 16.62,23.08 v1(17.977,23.08)
NetC7_1: C7.1 R4.2 | length 1.4
  Top Layer w0.2: C7.1 18.705,29.557 R4.2
NetC7_2: C7.2 U6.6 | length 6.2
  Top Layer w0.2: C7.2 17.78,26.077 18.765,25.091 18.984,25.091 18.988,25.088 21.766,25.088 21.792,25.113 U6.6
NetC8_1: C8.1 U6.1 | length 6
  Top Layer w0.2: C8.1 18.292,15.857 18.048,16.1 18.048,19.605 18.634,20.191 U6.1
NetC8_2: C8.2 D8.2 L1.1 U6.3 | length 16.1
  Top Layer w0.2: D8.2 16.399,25.393 17.172,25.393 18.365,24.2 19.062,24.2 21.792,21.47 21.792,17.069 C8.2 21.22,15.216 L1.1@23.257,15.216
NetD1_1: D1.1 R1.1 | length 1.5
  Top Layer w0.2: R1.1 3.8,22.98 4,23.18 D1.1
NetD7_2: D7.2 SW3.1 | length 7.5
  Top Layer w0.2: D7.2 3.731,31.203 SW3.1
NetQ1_1: Q1.1 R21.2 | length 15.7
  Top Layer w0.2: R21.2 31.754,14.731 32.04,14.445 35.713,14.445 36.539,15.271 36.539,16.782 38.387,18.631 38.387,22.46 Q1.1
NetQ2_1: Q2.1 R22.2 | length 1.4
  Top Layer w0.2: R22.2 Q2.1
NetR5_1: R5.1 R6.2 U6.5 | length 9.9
  Top Layer w0.2: R5.1 19.806,26.637 23.036,26.637 23.062,26.612 U6.5 23.062,22.386 R6.2
RSTb: J5.1 R24.2 U1.9 | length 9.4
  Top Layer w0.2: J5.1 26.701,22.456 R24.2 R24.2@27.896,22.494 ; v1(27.74,20.2) 27.864,20.2 28.971,21.307 28.971,21.817 29.206,22.052 29.646,22.052 U1.9@29.646,22.152
  Bottom Layer w0.2: J5.1 27.74,21.416 v1(27.74,20.2)
RTSb: Q1.2 R22.1 U1.19 | length 13.5
  Top Layer w0.2: R22.1 32.836,16.507 33.212,16.132 35.468,16.132 35.839,16.503 35.839,17.874 35.611,18.103 ; U1.19 33.55,20.164 35.611,18.103 ; Q1.2 37.021,21.92 37.021,21.456 37.363,21.114 37.363,19.805 35.662,18.103 35.611,18.103
RXD: R17.2 U1.20 | length 1.2
  Top Layer w0.2: U1.20 34.363,21.092 R17.2
RXD0: D2.34 R18.1 | length 25.2
  Top Layer w0.2: R18.1 36.378,21.571 36.378,20.791 v1(36.513,20.655) ; D2.34 v1(53.062,16.045)
  Bottom Layer w0.2: v1(36.513,20.655) 48.452,20.655 v1(53.062,16.045)
TXD: R18.2 U1.21 | length 1.6
  Top Layer w0.2: U1.21 34.031,21.592 34.102,21.663 34.102,21.734 34.29,21.922 34.509,21.922 34.627,22.04 R18.2
TXD0: D2.35 R17.1 | length 25.3
  Top Layer w0.2: R17.1 35.65,21.283 v1(35.65,19.309) ; v1(54.298,13.6) 54.298,11.459 D2.35
  Bottom Layer w0.2: v1(35.65,19.309) 43.183,19.309 46.76,15.732 48.716,15.732 50.848,13.6 v1(54.298,13.6)
USB_DN: D4.2 J1.2 U1.4 | length 34.4
  Top Layer w0.2: J1.2 8.768,15.088 9.48,15.8 D4.2 10.64,15.8 11.444,16.604 13.1,16.604 v1(15.028,18.532) ; v1(30.7,25) 30.731,25 31.346,24.385 U1.4@31.346,23.852
  Bottom Layer w0.2: v1(15.028,18.532) 27.632,18.532 28.971,19.871 28.971,23.96 30.011,25 v1(30.7,25)
USB_DP: D5.2 J1.3 U1.3 | length 44.5
  Top Layer w0.2: J1.3 5.518,14.438 v1(8.357,11.6) 10.073,11.6 D5.2 D5.2@10.126,11.905 ; U1.3 31.85,24.44 32.25,24.84 34.716,24.84 v1(34.761,24.885)
  Bottom Layer w0.2: v1(8.357,11.6) 21.609,11.6 26.8,16.791 29.151,16.791 33.465,21.105 33.465,23.31 34.761,24.605 v1(34.761,24.885)
VBUS: D3.1 D6.2 J1.1 R25.1 | length 23.1
  Top Layer w0.2: 8.76,17.28 8.778,17.262 R25.1
  Top Layer w0.4: D3.1 2.289,19.842 3.265,18.867 5.197,18.867 6.184,17.88 6.184,15.738 ; J1.1 6.184,15.738 ; D6.2 11.316,23.571 11.935,22.953 11.935,19.947 10.984,18.996 10.175,18.996 9.539,18.36 8.76,17.581 8.76,17.28 8.76,16.371 8.128,15.739 6.48,15.739 6.184,15.738
VBUS_DETECT: R25.2 R26.2 U1.8 | length 21.8
  Top Layer w0.2: R25.2 R26.2 11.556,17.75 v1(13.571,19.765) ; v1(26.18,20.1) 27.64,21.56 28.231,21.56 28.576,21.905 28.576,22.386 28.782,22.592 U1.8
  Bottom Layer w0.2: v1(13.571,19.765) 13.906,20.1 v1(26.18,20.1)
pads on no net: D2.4 D2.5 D2.6 D2.7 D2.8 D2.17 D2.18 D2.19 D2.21 D2.22 D2.27 D2.28 D2.29 D2.30 D2.31 D2.32 J1. J1.4 J1.8 J1.11 J4. SW1.3 SW1.4 SW2.3 SW2.4 SW3.3 U1.10 U1.11 U1.12 U1.13 U1.14 U1.16 U1.17 U1.18 U1.22 U1.24 U6.7 U6.8

## Polygon pours and split planes (outlines as drawn)
GND on Top Layer "Top Layer-GND" (solid, remove dead copper, pour order 4): 0,0 0,40.1 59.057,40.1 59.057,0
GND on Bottom Layer "Bottom Layer-GND" (solid, remove dead copper, pour order 5): 0,0 0,40.1 59.057,40.1 59.057,0

## Other copper
Top Layer:
  text "TOP" at 0.862,1.12 h1.52
Bottom Layer:
  text "BOT" at 4.885,1.12 h1.52

## Silkscreen, mask and mechanical layers (free items; w line width, h text height)
Top Overlay:
  text "EXT9V" at 31.657,39.708 h1.2 r270
  text "(POWER)" at 0.532,39.6 h1.2 r270
  text "IO12" at 8.8,38.9 h1.2 r270
  text "IO12" at 11.357,38.9 h1.2 r270
  text "IO14" at 13.857,38.9 h1.2 r270
  text "IO14" at 16.5,38.9 h1.2 r270
  text "IO27" at 18.905,38.9 h1.2 r270
  text "IO33" at 24.007,38.9 h1.2 r270
  text "IO27" at 21.4,38.8 h1.2 r270
  text "IO33" at 26.577,38.8 h1.2 r270
  text "3V3" at 56.857,38.4 h1.2 r270
  text "DI2" at 44.5,38.3 h1.2 r270
  text "CI2" at 41.8,38.2 h1.2 r270
  text "DI2" at 46.9,38.2 h1.2 r270
  text "CI2" at 39.225,38.1 h1.2 r270
  text "5V" at 36.707,38 h1.2 r270
  text "EN" at 54.5,38 h1.2 r270
  text "5V" at 33.991,37.9 h1.2 r270
  text "GND" at 5.477,36.8 h1.2
  text "GND" at 28.255,36.7 h1.2
  text "GND" at 48.676,36.678 h1.2
  text "GND" at 51.349,36.683 h1.2
  text "Rst_n" at 8.526,25.531 h1.2
  text "GND" at 3.587,7.467 h1.2
  text "EXT9V" at 3.706,6.4 h1.2
  text "Boot_n" at 12.16,6.254 h1.2
  text "IO13" at 8.737,2.501 h1.2 r270
  text "IO13" at 11.399,2.501 h1.2 r270
  text "CLK" at 13.8,2.52 h1.2 r270
  text "IO15" at 16.074,2.5 h1.2 r270
  text "IO15" at 18.9,2.5 h1.2 r270
  text "IO2" at 21.5,2.5 h1.2 r270
  text "IO2" at 23.8,2.5 h1.2 r270
  text "IO0" at 26.517,2.501 h1.2 r270
  text "IO4" at 29.057,2.501 h1.2 r270
  text "IO4" at 31.597,2.501 h1.2 r270
  text "IO21" at 34.1,2.5 h1.2 r270
  text "DI1" at 44.2,2.5 h1.2 r270
  text "DI1" at 46.8,2.501 h1.2 r270
  text "CI1" at 49.252,2.5 h1.2 r270
  text "CI1" at 51.6,2.5 h1.2 r270
  text "5V" at 54.4,2.501 h1.2 r270
  text "5V" at 56.882,2.501 h1.2 r270
  text "GND" at 5.555,1.6 h1.2
  text "GND" at 35.9,1.436 h1.2
  text "GND" at 38.526,1.4 h1.2
  text "GND" at 41.138,1.4 h1.2
Mechanical 6:
  lines w0.1: 59.057,40.08 0,40.08 0,0 59.057,0 59.057,40.08 ; 59.057,40.08 59.057,40.08

## Dimensions
57.357,4.08 to 57.417,34.8 on Mechanical 8
6.557,4.08 to 0,0 on Mechanical 8
0,-10.9 to -1.545,-10.9 on Mechanical 8
0,0 to 65.632,11 on Mechanical 8
65.632,11 to -1.545,24.679 on Mechanical 8
59.057,0 to 65.632,11 on Mechanical 8
59.057,40.08 to 59.057,0 on Mechanical 8
0,0 to 59.057,0 on Mechanical 8

## Text inside footprints (layer, text, board x,y; h text height)
J1: Mechanical 1 "PCB EDGE" at 0,21.638 h0.3 r270